# EAGLE board Day light emulate for birds (EAGLE 6.1)
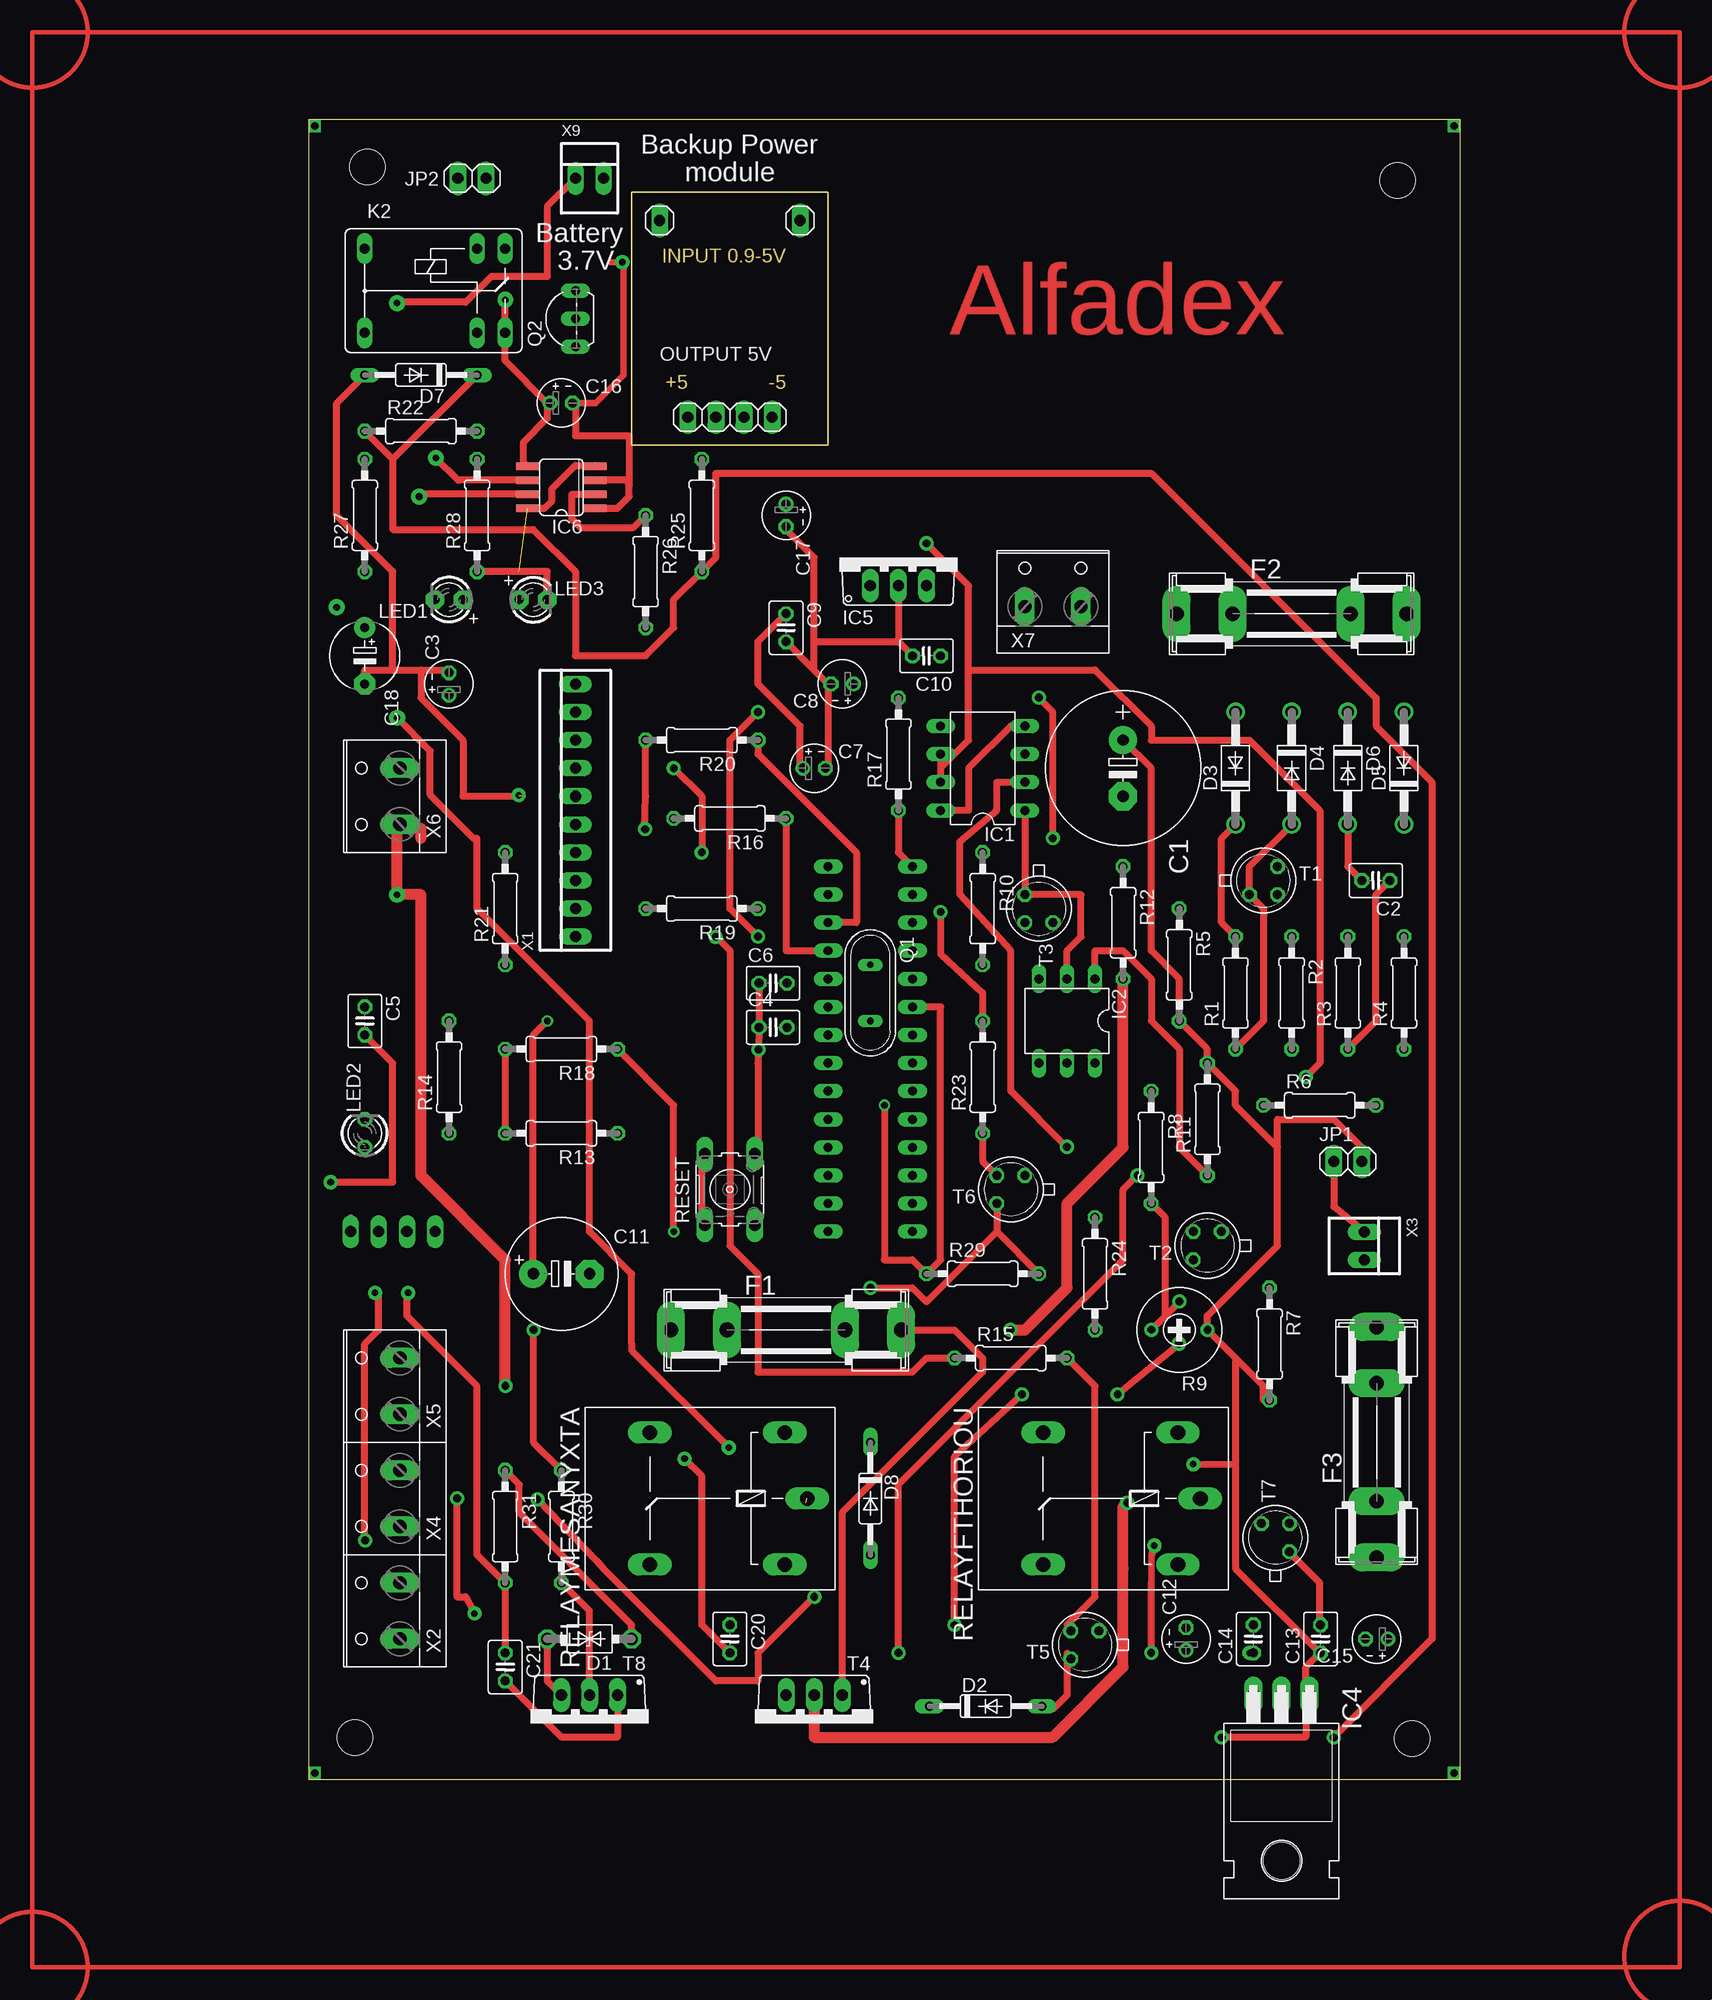
[diagram p0: board, top side]
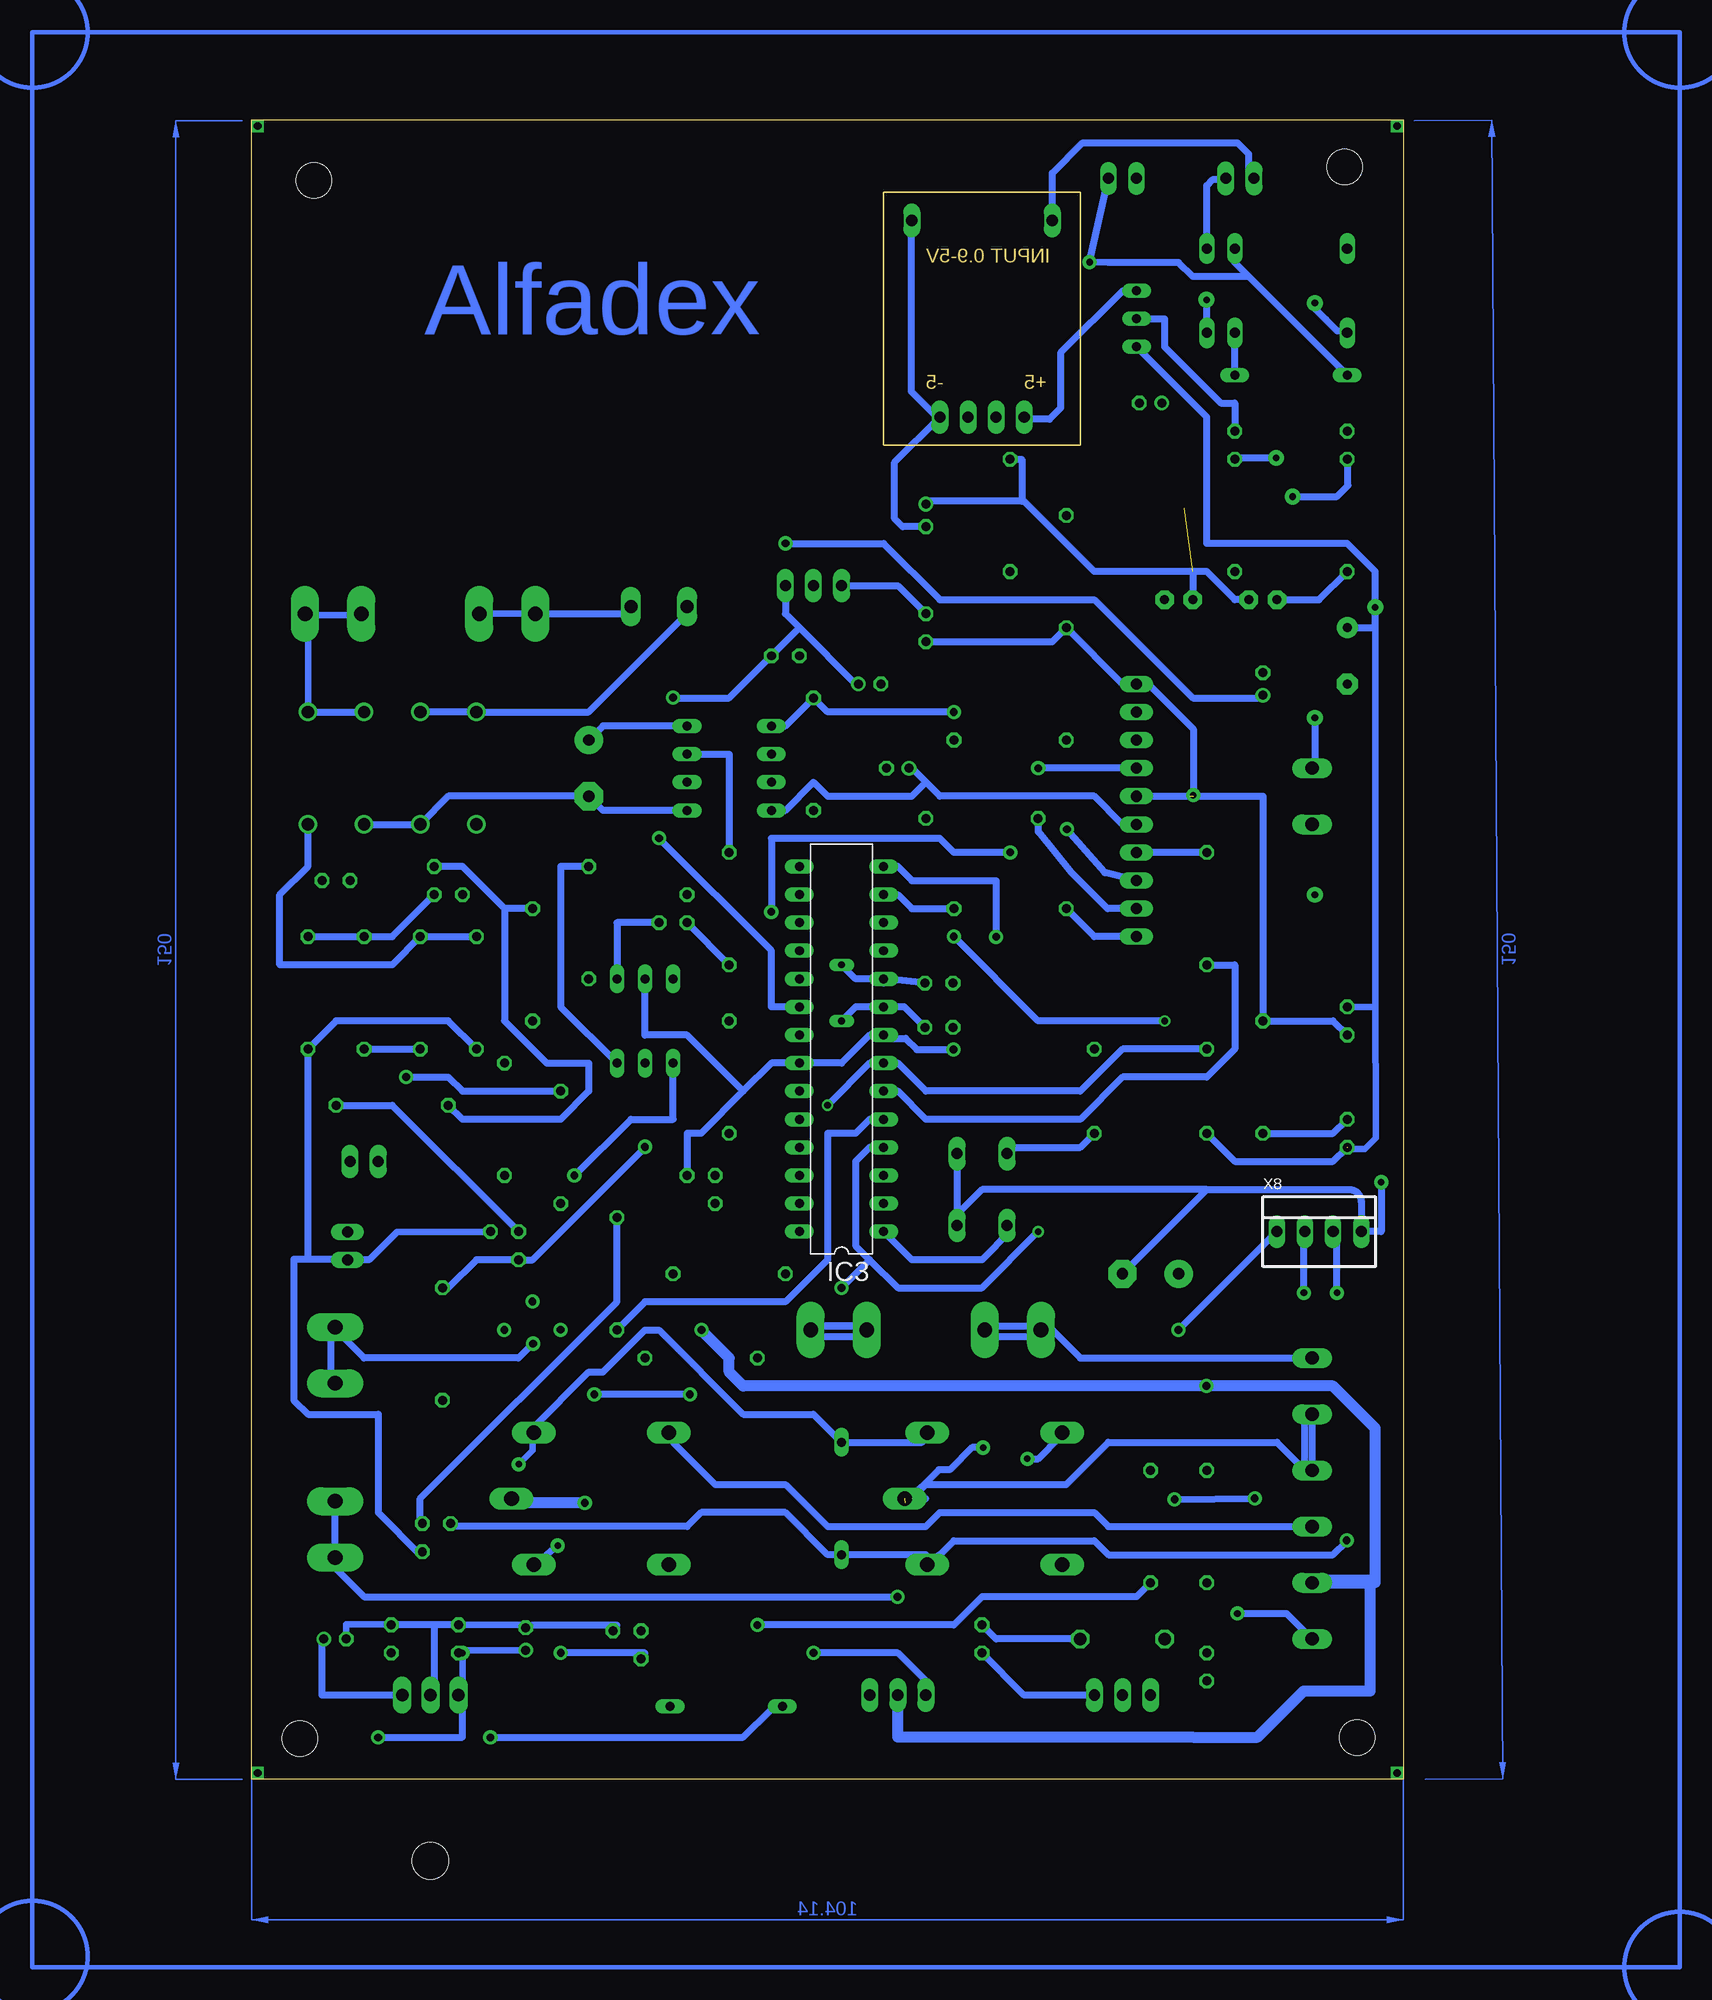
[diagram p1: board, bottom side, seen from below]

Size 104.16 x 150.08 mm. Coordinates in mm from the lower left corner, seen from the top.
Outline: 0,0 104.16,0 104.16,150.08 0,150.08 0,0
Copper layers (1*16): Top 0.035mm / dielectric 1.5mm / Bottom 0.035mm
Design rules: minimum track width 25mil, minimum drill 24mil, track to track 30mil, track to pad 30mil, pad to pad 15mil, via to via 8mil, smd to smd 8mil, copper to edge 40mil, drill to drill 8mil, minimum pad ring 10mil, minimum via ring 8mil, stop-mask expansion 4mil, vias tented up to drill 0mil, thermal gap 10mil
Net classes: 0 default: width 0.038 mm; 1 230v: width 1.016 mm
Holes 3.2 mm at 5.3,145.8 98.5,144.6 4.2,3.8 99.8,3.7

## Footprints (pad centres in the part's own frame; a part is rotated, then mirrored left to right if it is on the bottom)
E5-13 = drill 1.016 pad 2.54: + -2.54,0 | drill 1.016 pad 2.54 octagon: - 2.54,0
C025-030X050 = drill 0.813 octagon: 1 -1.27,0; 2 1.27,0
E2-4 = drill 0.813 pad 1.27: + -1.016,0 | drill 0.813 pad 1.27 octagon: - 1.016,0
E5-10,5 = drill 1.016 pad 2.54: + -2.54,0 | drill 1.016 pad 2.54 octagon: - 2.54,0
E5-6 = drill 0.813 pad 1.905: + -2.54,0 | drill 0.813 pad 1.905 octagon: - 2.54,0
GT32 = drill 1.118 octagon: 1 -3.81,0; 2 3.81,0
DO35-10 = drill 0.813 long: A 5.08,0; C -5.08,0
DO41-10 = drill 1.118: A 5.08,0; C -5.08,0
SHK20L = drill 1.321 pad 2.54 long: 1A -10.414,0; 1B -5.334,0; 2A 10.414,0; 2B 5.334,0
DIL-08 = drill 0.813 long: 1 -3.81,-3.81; 2 -1.27,-3.81; 3 1.27,-3.81; 4 3.81,-3.81; 5 3.81,3.81; 6 1.27,3.81; 7 -1.27,3.81; 8 -3.81,3.81
DIL06 = drill 0.813 long: 1 -2.54,-3.81; 2 0,-3.81; 3 2.54,-3.81; 4 2.54,3.81; 5 0,3.81; 6 -2.54,3.81
DIL28-3 = drill 0.813 long: 1 -16.51,-3.81; 2 -13.97,-3.81; 3 -11.43,-3.81; 4 -8.89,-3.81; 5 -6.35,-3.81; 6 -3.81,-3.81; 7 -1.27,-3.81; 8 1.27,-3.81; 9 3.81,-3.81; 10 6.35,-3.81; 11 8.89,-3.81; 12 11.43,-3.81; 13 13.97,-3.81; 14 16.51,-3.81; 15 16.51,3.81; 16 13.97,3.81; 17 11.43,3.81; 18 8.89,3.81; 19 6.35,3.81; 20 3.81,3.81; 21 1.27,3.81; 22 -1.27,3.81; 23 -3.81,3.81; 24 -6.35,3.81; 25 -8.89,3.81; 26 -11.43,3.81; 27 -13.97,3.81; 28 -16.51,3.81
TO220H = drill 1.118 long: 1 -2.54,-10.16; 2 0,-10.16; 3 2.54,-10.16 | hole 3.302: 0,4.826
TO220V = drill 1.016 long: 1 -2.54,-2.54; 2 0,-2.54; 3 2.54,-2.54
SO08 = smd 0.66 x 2.032: 1 -1.905,-3.073; 2 -0.635,-3.073; 3 0.635,-3.073; 4 1.905,-3.073; 5 1.905,3.073; 6 0.635,3.073; 7 -0.635,3.073; 8 -1.905,3.073
1X02 = drill 1.016 long: 1 -1.27,0; 2 1.27,0
FRS1B = drill 0.914 long: 1 0,3.81; 2 0,-3.81; O -2.54,-3.81; P 10.16,3.81; P@ 10.16,-3.81; S -2.54,3.81
LED3MM = drill 0.813 pad 1.676 octagon: A -1.27,0; K 1.27,0
LED3MM' = drill 0.813 octagon: A -1.27,0; K 1.27,0
QS = drill 0.61 long: 1 -2.54,0; 2 2.54,0
TO92-EBC = drill 0.813 long: B 0,-1.27; C -2.54,-1.27; E 2.54,-1.27
0207/10 = drill 0.813 octagon: 1 -5.08,0; 2 5.08,0
RTRIM3339P = drill 0.61: 1 -2.54,0; 2 0,-2.54; 3 2.54,0
G5LE = drill 1.321 long: 1 -7.493,-5.969; 2 -7.493,5.969; O 4.699,5.969; P -9.525,0; S 4.699,-5.969
B3F-10XX = drill 1.016 long: 1 -3.251,2.261; 2 3.251,2.261; 3 -3.251,-2.261; 4 3.251,-2.261
STEPUP_CONVERTER_600MA = drill 1.016 long: 3 -6.35,-8.89; 8 6.35,-8.89; 22 -3.81,8.89; 23 -1.27,8.89; 24 1.27,8.89; 25 3.81,8.89
TO18 = drill 0.813 octagon: 1 -1.27,-1.27; 2 1.27,-1.27; 3 1.27,1.27
TO220BV = drill 1.016 long: G 2.54,-2.54; T1 -2.54,-2.54; T2 0,-2.54
22-23-2101 = drill 1 long: 1 -11.43,0; 2 -8.89,0; 3 -6.35,0; 4 -3.81,0; 5 -1.27,0; 6 1.27,0; 7 3.81,0; 8 6.35,0; 9 8.89,0; 10 11.43,0
W237-132 = drill 1.194 long: 1 -2.54,-0.635; 2 2.54,-0.635
22-23-2021 = drill 1 long: 1 -1.27,0; 2 1.27,0
22-23-2041 = drill 1 long: 1 -3.81,0; 2 -1.27,0; 3 1.27,0; 4 3.81,0

## Placement (x,y rotation side)
C1  1000μ  [E5-13]  73.66,91.44 270 top
C2  100n  [C025-030X050]  96.52,81.28 180 top
C3  1μ  [E2-4]  12.7,99.06 90 top
C4  22p  [C025-030X050]  42,68 0 top
C5  100n  [C025-030X050]  5.08,68.58 270 top
C6  22p  [C025-030X050]  42,72 0 top
C7  47μ  [E2-4]  45.72,91.44 0 top
C8  47μ  [E2-4]  48.26,99.06 180 top
C9  100n  [C025-030X050]  43.18,104.14 270 top
C10  100n  [C025-030X050]  55.88,101.6 180 top
C11  220μ  [E5-10,5]  22.86,45.72 0 top
C12  1μ  [E2-4]  79.36,12.7 90 top
C13  100n  [C025-030X050]  91.52,12.7 90 top
C14  100n  [C025-030X050]  85.44,12.7 90 top
C15  1μ  [E2-4]  96.6,12.7 180 top
C16  10μ  [E2-4]  22.86,124.46 0 top
C17  10μ  [E2-4]  43.18,114.3 270 top
C18  3300μF 6.3v  [E5-6]  5.08,101.6 270 top
C20  47n  [C025-030X050]  38.1,12.7 270 top
C21  47n  [C025-030X050]  17.78,10.16 270 top
D1  DIAC  [GT32]  25.4,12.7 180 top
D2  1N4148  [DO35-10]  61.23,6.62 0 top
D3  1  [DO41-10]  83.82,91.44 90 top
D4  2  [DO41-10]  88.9,91.44 270 top
D5  3  [DO41-10]  99.06,91.44 90 top
D6  [DO41-10]  93.98,91.44 270 top
D7  1N4148  [DO35-10]  10.16,127 180 top
D8  1N4148  [DO35-10]  50.8,25.4 270 top
F1  6A  [SHK20L]  43.18,40.64 0 top
F2  1A  [SHK20L]  88.9,105.41 0 top
F3  6A  [SHK20L]  96.6,30.48 90 top
IC1  NE555  [DIL-08]  60.96,91.44 90 top
IC2  Moc3021  [DIL06]  68.58,68.58 180 top
IC3  ATMEGA168-PU  [DIL28-3]  50.8,66.04 90 bottom
IC4  7806T  [TO220H]  87.98,-2.54 180 top
IC5  7805  [TO220V]  53.34,110.49 0 top
IC6  TP4056  [SO08]  22.86,116.84 90 top
JP1  Ammeter jumper  [1X02]  93.98,55.88 0 top
JP2  Power Battery on  [1X02]  14.78,144.78 0 top
K2  FRS1B  [FRS1B]  15.24,134.62 180 top
LED1  RED  [LED3MM]  12.7,106.68 180 top
LED2  Arduino led  [LED3MM']  5.08,58.42 90 top
LED3  BLUE  [LED3MM]  20.32,106.68 0 top
Q1  16MHz  [QS]  50.8,71.12 270 top
Q2  BC558A  [TO92-EBC]  22.86,132.08 90 top
R1  10k  [0207/10]  83.82,71.12 90 top
R2  1k  [0207/10]  88.9,71.12 270 top
R3  4.7k  [0207/10]  93.98,71.12 90 top
R4  100k  [0207/10]  99.06,71.12 90 top
R5  10k  [0207/10]  78.74,73.66 270 top
R6  1k  [0207/10]  91.44,60.96 0 top
R7  4.7k  [0207/10]  86.9,39.37 270 top
R8  1k  [0207/10]  76.2,57.15 270 top
R9  20k  [RTRIM3339P]  78.74,40.64 180 top
R10  1.5k  [0207/10]  60.96,78.74 270 top
R11  1k  [0207/10]  81.28,59.69 90 top
R12  1k  [0207/10]  73.66,77.47 270 top
R13  10k  [0207/10]  22.86,58.42 180 top
R14  1k  [0207/10]  12.7,63.5 90 top
R15  22k  [0207/10]  63.5,38.1 0 top
R16  560  [0207/10]  38.1,86.9 180 top
R17  1k  [0207/10]  53.34,92.71 90 top
R18  10k  [0207/10]  22.86,66.04 180 top
R19  560  [0207/10]  35.56,78.74 180 top
R20  560  [0207/10]  35.56,93.98 180 top
R21  560  [0207/10]  17.78,78.74 90 top
R22  3.9k  [0207/10]  10.16,121.92 0 top
R23  1k  [0207/10]  60.96,63.5 90 top
R24  22k  [0207/10]  71.12,45.72 270 top
R25  0.5  [0207/10]  35.56,114.3 90 top
R26  1.5K  [0207/10]  30.48,109.22 270 top
R27  10K  [0207/10]  5.08,114.3 90 top
R28  10K  [0207/10]  15.24,114.3 90 top
R29  5.6k  [0207/10]  60.96,45.72 0 top
R30  3.3k  [0207/10]  22.86,22.86 270 top
R31  15k  [0207/10]  17.78,22.86 270 top
RELAYFTHORIOU  G5L  [G5LE]  71.12,25.4 180 top
RELAYMESANYXTA  G5L  [G5LE]  35.56,25.4 180 top
RESET  [B3F-10XX]  38.1,53.34 90 top
STEPUP1  steup converter 600mA  [STEPUP_CONVERTER_600MA]  38.1,132.08 180 top
T1  2N2222  [TO18]  86.36,81.28 0 top
T2  2N2222  [TO18]  81.28,48.26 180 top
T3  2n2222  [TO18]  66.04,78.74 270 top
T4  BT138-V  [TO220BV]  45.72,5.08 180 top
T5  2N2222  [TO18]  70.2,12.16 180 top
T6  2N2222  [TO18]  63.5,53.34 180 top
T7  2N2222  [TO18]  87.44,21.86 90 top
T8  BT138-V  [TO220BV]  25.4,5.08 180 top
X1  22-23-2101  [22-23-2101]  24.13,87.63 90 top
X2  night bulb  [W237-132]  7.62,15.24 90 top
X3  power 12V  [22-23-2021]  95.48,48.24 270 top
X4  fluerecent  [W237-132]  7.62,25.4 90 top
X5  Bulb  [W237-132]  7.62,35.56 90 top
X6  230AC  [W237-132]  7.62,88.9 90 top
X7  9Vac  [W237-132]  67.31,106.68 0 top
X8  22-23-2041  [22-23-2041]  7.62,49.53 0 bottom
X9  [22-23-2021]  25.4,144.78 0 top

## Library data of the parts
C1-C18 C20 C21 R1-R8 R10-R25 R27-R31 = rcl
D1-D8 = diode
F1-F3 = fuse
IC1 = st-microelectronics
IC2 = ic-package
IC3 = Arduino-AVR
IC4 IC5 = linear
IC6 LED1 LED3 = adafruit
JP1 JP2 = pinhead
K2 RELAYFTHORIOU RELAYMESANYXTA = relay
LED2 = led
Q1 = special
Q2 = transistor-pnp
R9 = resistor
R26 = rcl; CURRENT: When battery fully empty,entire 12v current is 800mA
RESET = switch-omron
STEPUP1 = Step up converter 600mA; STEPUP: step up converter 600mA
T1-T3 T5-T7 = transistor
T4 T8 = triac
X1 X3 X8 X9 = con-molex
X2 X4-X7 = con-wago-508; OC_FARNELL: unknown; OC_NEWARK: unknown

## Nets
1.16MA: Q2.B R22.2
230V: RELAYMESANYXTA.P X4.2 X5.1 X6.2
+5V: C5.1 C8.+ C10.1 C18.+ IC3.7 IC3.20 IC5.3 LED2.A Q2.C R13.2 R18.2 R29.1
+12V: C1.+ C7.+ C9.1 C13.1 C15.+ D2.C D8.C IC1.4 IC1.8 IC4.1 IC5.1 JP1.2 R5.2 R7.2 R9.1 R11.2 RELAYFTHORIOU.1 RELAYMESANYXTA.1 X1.5
GND: C1.- C2.2 C3.- C4.1 C5.2 C6.1 C7.- C8.- C9.2 C10.2 C11.- C12.- C13.2 C14.2 C15.- C16.- C17.- C18.- D4.A D6.A D7.A IC1.1 IC2.2 IC3.8 IC3.22 IC4.2 IC5.2 IC6.1 IC6.3 K2.2 R1.1 R4.1 R14.2 R26.2 RESET.3 RESET.4 STEPUP1.3 STEPUP1.22 T1.1 T2.1 T3.1 T5.1 T6.1 T7.1 X1.6 X1.10 X3.2 X8.4 X9.2
MORNING: R19.2 X1.1
N$1: IC3.11 R16.1
N$2: C2.1 R2.2 R3.1
N$3: R3.2 R4.2 T1.2
N$4: R5.1 R6.1 T1.3
N$5: R6.2 T2.2
N$6: IC1.2 R7.1 T2.3
N$7: R8.2 R9.2 R9.3
N$8: IC1.3 R10.1
N$9: C3.+ IC1.6 IC1.7 R8.1
N$10: R10.2 T3.2
N$11: IC2.1 R11.1 T3.3
N$12: IC2.6 R12.1
N$13: IC2.4 T4.G
N$14: F1.1A X5.2
N$15: JP2.1 STEPUP1.8
N$16 [230v]: R12.2 RELAYFTHORIOU.P T4.T2 X2.2 X6.1
N$17: F2.1A X7.2
N$18: IC3.1 R13.1 RESET.1 RESET.2
N$19: LED2.K R14.1
N$20: D1.2 T8.G
N$21: C6.2 IC3.10 Q1.1
N$22: C4.2 IC3.9 Q1.2
N$23: IC3.14 R15.1
N$24: R15.2 T5.2
N$25: D2.A RELAYFTHORIOU.2 T5.3
N$26: IC3.13 R19.1
N$27: C11.+ IC1.5 R17.2
N$28: R16.2 X1.2
N$29: IC3.15 R17.1
N$30: IC3.6 R21.1
N$31: R21.2 X1.4
N$32: RELAYFTHORIOU.S X4.1
N$33: IC3.12 R20.1
N$34: D3.A D4.C X7.1
N$35: D5.A D6.C F2.2A
N$36: D3.C D5.C R1.2 R2.1
N$37: R20.2 X1.3
N$38: K2.P X9.1
N$39: JP2.2 K2.O
N$40: C12.+ C14.1 D7.C IC4.3 K2.1 R22.1 R25.1
N$41: IC3.5 R24.2
N$42: R24.1 T7.2
N$43: D8.A RELAYMESANYXTA.2 T7.3 X8.3
N$44: C20.2 C21.2 RELAYMESANYXTA.S T8.T1
N$45: Q2.E STEPUP1.25
N$46: C17.+ IC6.4 IC6.8 LED1.A LED3.A R25.2
N$47: IC6.7 R27.2
N$48: IC6.6 R28.2
N$49: C16.+ IC6.5 K2.S
N$50: LED1.K R27.1
N$51: IC6.2 R26.1
N$52: LED3.K R28.1
N$53: JP1.1 X3.1
N$54: R23.2 X1.7
N$55: R23.1 T6.2
N$56: IC3.4 R18.1 R29.2 T6.3
N$57: C20.1 D1.1 R31.1
N$58: C21.1 R31.2 X8.2
N$59: R30.1 X8.1
N$60: F3.1A X2.1
N$61: F3.2A R30.2 T8.T2
N$62: F1.2A T4.T1

## Tracks (layer width: path | path; a pad name or v marks a point on that pad's centre or on a via)
1.16MA
  Bottom 0.635: R22.2 15.24,124.46 16.51,124.46 21.59,129.54 21.59,132.08 Q2.B
230V  (via drill 0.6 pad 1.27, 0.6 pad 1.42)  (2 unrouted)
  Top 0.635: 8.89,27.94 X4.2 | 44.45,25.4 RELAYMESANYXTA.P | v38,30 29.21,38.79 29.21,39.37 29.21,45.72 25.4,49.53 25.4,68.58 15.24,78.74 15.24,85.09 14.91,85.09 11,89 11,93 v8,96
  Bottom 0.635: 8.89,27.94 11.43,30.48 26.67,30.48 30.48,26.67 43.18,26.67 44.45,25.4 43.18,25.4 | 8.89,27.94 X4.2 | v38,30 39,30 41,28 42,28 45,25 | 8,28 8.26,28.25 X5.1 8.89,32.38 8.89,27.94 | v8,96 8,92 8.5,91.5 | 8.5,91.5 9,91 | X6.2 8.44,91.44 8.5,91.5
+5V  (via drill 0.6 pad 1.42, 0.61)  (1 unrouted)
  Top 0.635: IC3.20 57.15,69.85 57.15,46.99 R29.1 54.61,46.99 52.07,46.99 v52.07,60.96 | v66.04,97.79 67.31,96.52 v67.31,85.09 | R18.2 R13.2
  Bottom 0.61: v2.54,106 2.51,69.8 | 2.51,69.8 2.5,59.7 2.5,58 3.5,57 4.9,57 5.1,57.2 | C5.1 2.56,69.85 2.51,69.8
  Bottom 0.635: 54.61,104.14 55.88,105.41 IC5.3 | 54.61,104.14 49.53,99.06 C8.+ | 54.61,104.14 C10.1 60.96,97.79 v66.04,97.79 | v67.31,85.09 57.15,74.93 57.15,69.85 IC3.20 | Q2.C 17.78,123.19 17.78,111.76 5.08,111.76 2.54,109.22 v2.54,106 2.54,104.14 C18.+ | LED2.A 6.35,55.88 15.24,55.88 R13.2 | R18.2 25.4,66.04 29.21,62.23 43.18,62.23 45.72,64.77 IC3.7 48.26,64.77 v52.07,60.96
+12V  (via drill 0.6 pad 1.27, 0.61)
  Top 0.61: v80,28.5 83.5,28.5 83.82,28.5
  Top 0.635: C9.1 40.64,102.87 40.64,99.06 44.45,95.25 44.45,91.44 C7.+ | v82.55,3.81 90.17,3.81 90.17,7.62 | 90.17,7.62 IC4.1 90.17,7.62 | 91.44,11.43 90.17,10.16 90.17,7.62 | 91.44,11.43 C13.1 91.44,11.43 | IC1.8 59.69,87.63 59.69,91.44 63.5,95.25 IC1.4 | 83.82,38.1 86.36,35.56 86.36,34.29 R7.2 | 83.82,38.1 R9.1 81.28,41.91 87.63,48.26 87.63,57.15 | JP1.2 95.25,57.15 92.71,59.69 87.63,59.69 87.63,57.15 | 83.82,38.1 83.82,36.83 83.82,28.5 83.82,19.05 91.44,11.43 | 78.74,31.75 RELAYFTHORIOU.1 | 87.63,57.15 83.82,60.96 83.82,62.23 R11.2 81.28,66.04 R5.2 78.74,72.39 76.2,74.93 76.2,91.44 C1.+
  Bottom 0.61: 78.74,31.75 78.74,29.76 v80,28.5
  Bottom 0.635: C9.1 45.72,107.95 IC5.1 | 43.18,90.17 41.91,88.9 27.94,88.9 25.4,86.36 X1.5 | 43.18,90.17 44.45,91.44 C7.+ | v82.55,3.81 59.69,3.81 57.15,6.35 D2.C | IC4.1 97.79,7.62 97.79,12.7 C15.+ | IC4.1 90.17,7.62 IC4.1 | C1.+ 72.39,95.25 IC1.4 | RELAYFTHORIOU.1 78.74,31.75 73.66,36.83 72.39,36.83 68.58,40.64 67.31,40.64 59.69,33.02 53.34,33.02 D8.C 43.52,30.48 43,31 43.05,31.05 RELAYMESANYXTA.1 | 43.18,90.17 44.45,88.9 52.07,88.9 53.34,90.17 55.88,87.63 IC1.8
GND  (via drill 0.6 pad 1.27)  (1 unrouted)
  Top 0.61: 24.13,124.46 25.96,124.46 28.5,127 28.5,137.1 27.3,137.2 28.47,137.1 v28.37,137.2
  Top 0.635: 53.34,102.87 C10.2 | IC5.2 53.34,102.87 | 46.99,99.06 46.99,91.44 C7.- | 46.99,99.06 45.72,100.33 | 45.72,100.33 C9.2 | 46.99,99.06 C8.- | 45.72,100.33 45.72,102.87 | 45.72,102.87 45.72,110.49 43.18,113.03 C17.- | 45.72,102.87 53.34,102.87 | C16.- 24.13,124.46 24.13,121.5 29,121.5 29,117 | 7.62,100.33 5.08,100.33 C18.- | 7.62,100.33 10.16,100.33 | 10.16,100.33 12.7,100.33 C3.- | 19.32,88.9 13.97,88.9 13.97,93.98 10.16,97.79 10.16,100.33 | D7.A 2.54,124.46 2.54,114.3 7.62,109.22 7.62,100.33 | T7.1 88.9,20.32 91.44,17.78 91.44,13.97 C13.2 | C2.2 93.98,82.55 D6.A | R1.1 86.36,68.58 86.36,78.74 T1.1 85.09,82.55 D4.A | IC1.1 T3.1 69.85,80.01 69.85,76.2 68.58,74.93 IC2.2 | C6.1 C4.1 v40.67,66.01 40.64,64.77 40.64,57.15 RESET.4 | C5.2 7.62,64.77 7.62,54 v2,54 | X8.4 3.81,50.8 | X1.6 arc60 v24,89 | IC6.1 27.93,114.94 29,116 29,117 | 29,117 28.9,117.5 26.51,117.5 IC6.3
  Bottom 0.61: v95.52,47.03 95.52,47.01 X3.2 95.5,47 95.47,47.03 v95.29,47.03 | C14.2 79.61,13.97 C12.- | C15.- 95.58,14 91.4,14 91.4,13.97 C13.2
  Bottom 0.635: C9.2 31.75,102.87 R26.2 25.4,99.06 X1.10 23.06,99.06 19,95 19,88.9 | 13.97,135.89 15.24,137.16 K2.2 | 13.97,135.89 D7.A | C5.2 6.35,68.58 R14.2 12.7,88.9 19,88.9 | X1.6 24,88.9 | X9.2 v28.37,137.2 26.67,137.16 20.32,137.16 19.05,135.89 13.97,135.89 | 17.78,53.34 4.9,53.34 arc90 3.81,52.25 X8.4 2,49.53 v2,54 | C11.- 17.78,53.34 | 17.78,53.34 38.1,53.34 40.64,50.8 RESET.3 RESET.4 40.36,57 40,57 | T5.1 71.12,13.97 78.74,13.97 C12.- | 87.63,13.97 87.63,7.62 IC4.2 | 87.63,13.97 C14.2 85.09,13.97 | 87.63,13.97 C13.2 | T2.1 91,49.5 93.47,47.03 v95.29,47.03 v95.52,47.03 99.06,47.03 | 99.06,47.03 R4.1 96.52,68.58 86.36,68.58 R1.1 | D6.A D4.A 86.36,88.9 C1.- 72.39,87.63 IC1.1 | T6.1 64.77,58.42 63.5,58.42 59.69,62.23 | 59.69,62.23 57.15,64.77 IC3.22 50.8,64.77 48.26,67.31 IC3.8 46.68,67 45,67 44,66 43.99,66.01 v40.67,66.01 | IC2.2 68.58,67.31 64.77,67.31 59.69,62.23 | 99.06,47.03 100.33,47.03 100.33,34.29 99.06,33.02 92.71,33.02 92.71,24.13 88.9,20.32 T7.1 | v24,89 24,88.9 | 24,88.9 19,88.9 | C17.- 45.28,113.28 46,114 46,119.1 STEPUP1.22 42.19,123.19 44.5,125.5 44.5,141 44.47,140.97 STEPUP1.3
MORNING
  Bottom 0.635: R19.2 27.94,76.2 X1.1
N$1
  Top 0.635: IC3.11 43.18,74.93 43.18,83.82 R16.1
N$2
  Top 0.635: C2.1 96.52,80.01 96.52,68.58 R3.1
  Bottom 0.635: R3.1 R2.2
N$3
  Bottom 0.635: R4.2 R3.2 91.44,76.2 T1.2
N$4
  Bottom 0.635: R6.1 85.09,59.69 76.2,59.69 73.66,62.23 73.66,64.77 77.47,64.77 81.28,68.58 81.28,78.74 | R5.1 81.28,78.74 | T1.3 85.09,82.55 81.28,78.74
N$5
  Bottom 0.635: T2.2 91.44,60.96 R6.2
N$6  (via drill 0.61)
  Top 0.635: IC1.2 62.23,90.17 62.23,87.63 58.92,84.82 58.92,80.01 63.5,74.93 63.5,62.23 v68.58,57.15
  Bottom 0.635: R7.1 86.36,44.45 83.82,46.99 T2.3 78.74,46.99 v68.58,57.15
N$7
  Top 0.635: R9.2 77.47,41.91 | 77.47,41.91 R9.3 | R8.2 77.47,50.8 77.47,41.91
N$8
  Bottom 0.635: R10.1 60.96,92.71 IC1.3
N$9  (via drill 0.61)
  Top 0.635: IC1.6 57.15,91.44 | 57.15,91.44 IC1.7 | v90.17,63.5 91.44,64.77 91.44,87.63 85.09,93.98 76.2,93.98 76.2,95.25 71.12,100.33 59.69,100.33 | 59.69,100.33 59.69,93.98 57.15,91.44 | v55.88,111.76 59.69,107.95 59.69,100.33
  Bottom 0.635: R8.1 85.09,62.23 86.36,63.5 v90.17,63.5 | v55.88,111.76 46.99,111.76 41.91,106.68 27.94,106.68 19.05,97.79 12.7,97.79 C3.+
N$10
  Bottom 0.635: T3.2 R10.2
N$11
  Top 0.635: R11.1 78.74,57.15 78.74,66.04 76.2,68.58 76.2,72.39 73.66,74.93 71.12,74.93 IC2.1
  Bottom 0.635: IC2.1 71.12,77.47 T3.3
N$12
  Bottom 0.635: IC2.6 76.2,69.85 76.2,82.55 R12.1
N$13  (via drill 0.61, 0.7 pad 1.27)
  Top 0.635: v74.93,54.61 73.66,53.34 73.66,46.99 53.34,26.67 v53.34,11.45 v53.34,11.43
  Bottom 0.635: IC2.4 66.04,59.69 69.85,59.69 v74.93,54.61 | v53.34,11.43 45.72,11.43 43.18,8.89 T4.G
N$14
  Bottom 0.635: X5.2 8.89,38.1 29.21,38.1 31.75,40.64 F1.1A
N$15
  Bottom 0.635: STEPUP1.8 31.75,145.25 29,148 18,148 15,148 14,147 14,145.27 JP2.1
N$16  (via drill 0.6 pad 1.27, 0.6 pad 1.42, 0.61)
  Top 1.016: R12.2 73.66,57.15 68.58,52.07 68.58,44.45 64.77,40.64 v63.5,40.64 | v17.78,35.56 17.78,46.99 10.16,54.61 10.16,80 v8,80 8,86 | T4.T2 45.72,3.81 67.31,3.81 73.66,10.16 73.66,19.05 73.66,24.66 v74,25 | 10.16,86 10.16,85.09 10.16,86 | 10.16,86 9,86 | 9,86 8,86 | 10.16,86 9,86 | 8.89,86.36 8.89,86 8,86 | 8,86 8,86.36 X6.1 8.26,86 8,86 | 9,86 8,86
  Bottom 1.016: v63.5,40.64 60.96,38.1 60.96,36.83 59.69,35.56 v17.78,35.56 6.35,35.56 2.54,31.75 2.54,17.78 7.62,17.78 X2.2 | T4.T2 45.72,3.81 19.05,3.81 13.19,3.81 9,8 3,8 3,18 8.04,18 X2.2 | 8.89,17.78 X2.2 | v74,25 80.25,25 RELAYFTHORIOU.P 80.64,25.36 81,25 80.6,25.4 80.01,25.4
N$17
  Bottom 0.635: F2.1A 70.48,105.41 X7.2
N$18
  Top 0.635: RESET.2 35.56,55.88 35.56,50.8 RESET.1
  Bottom 0.635: R13.1 29.21,57.15 35.56,57.15 RESET.2 | IC3.1 44.45,46.99 38.1,46.99 35.56,49.53 RESET.1
N$19
  Bottom 0.635: LED2.K 6.35,58.42 R14.1
N$20
  Top 0.635: T8.G 21.59,8.89 D1.2
N$21
  Bottom 0.635: Q1.1 49.53,72.39 IC3.10 46.99,72.01 arc90 47,72 arc90 46.61,72.39 C6.2
N$22
  Bottom 0.635: Q1.2 49.53,69.85 IC3.9 45.12,69.85 C4.2
N$23  (via drill 0.61)
  Top 0.635: R15.1 55.88,38.1 54.61,36.83 40.64,36.83 40.64,45.72 38.1,48.26 38.1,74.93 v36.83,76.2
  Bottom 0.635: v36.83,76.2 36.83,81.28 44.45,81.28 45.72,82.55 IC3.14
N$24
  Top 0.635: R15.2 71.12,35.56 71.12,16.51 68.58,13.97 T5.2
N$25  (via drill 0.6 pad 1.27, 0.61, 0.7 pad 1.27)
  Top 0.61: 76.2,17.78 76.2,20.2 v76.47,21.14
  Top 0.635: D2.A 67.31,6.35 68.58,7.62 68.58,11.43 T5.3 | v76.2,11.43 v76.2,11.45 76.2,17.78
  Bottom 0.61: v76.47,21.14 79,19 78,19 78.18,19 RELAYFTHORIOU.2
  Bottom 0.635: v76.2,11.43 68.58,11.43 T5.3
N$26
  Bottom 0.635: R19.1 44.45,78.74 45.72,80.01 IC3.13
N$27  (via drill 0.61)
  Top 0.635: v40.64,96.52 38.1,93.98 38.1,78.74 v40.64,76.2 | v21.59,68.58 20.32,67.31 C11.+
  Bottom 0.635: IC1.5 55.88,95.25 R17.2 52.07,96.52 v40.64,96.52 | v40.64,76.2 33.02,68.58 v21.59,68.58
N$28
  Bottom 0.635: X1.2 26.74,78.74 30,82 33,85.7 33,86.7 R16.2
N$29
  Top 0.635: IC3.15 53.34,83.82 R17.1
N$30
  Bottom 0.635: IC3.6 45.72,62.23 43.18,59.69 29.21,59.69 25.4,63.5 17.78,63.5 15.24,66.04 15.24,73.66 R21.1
N$31
  Bottom 0.635: R21.2 23.82,83.82 24,84 24,83.95 X1.4
N$32
  Bottom 0.635: X4.1 8.89,22.86 26.67,22.86 27.94,24.13 41.91,24.13 43.18,22.86 52.07,22.86 55.88,26.67 62.23,26.67 66.04,30.48 RELAYFTHORIOU.S
N$33
  Top 0.635: IC3.12 49.53,77.47 49.53,83.82 40.64,92.71 R20.1
N$34
  Bottom 0.635: X7.1 64.77,105.41 73.66,96.52 D3.A 89,96.5 D4.C
N$35
  Bottom 0.61: D5.A 99.06,105.16 F2.2A
  Bottom 0.635: D5.A D6.C
N$36
  Top 0.635: D3.C 82.55,85.09 82.55,77.47 R1.2
  Bottom 0.635: R1.2 R2.1 91.44,73.66 101.6,73.66 101.6,80.01 99.06,82.55 D5.C
N$37  (via drill 0.61, 0.7 pad 1.27)
  Top 0.635: R20.2 v30.48,93.97 30.48,88.9 v30.4,85.9
  Bottom 0.635: v30.4,85.9 27,82 X1.3
N$38  (via drill 0.6 pad 1.42)
  Top 0.635: X9.1 21.59,142.24 21.59,135.89 16.51,135.89 14.2,133.58 8,133.58 v8,133.5
  Bottom 0.635: v8,133.5 8,133 7,132 6,131 5,131 5.08,130.92 K2.P
N$39
  Bottom 0.635: K2.O 17.78,144.12 17.2,144.7 16.1,144.7 16,144.8 16.03,144.8 JP2.2
N$40  (via drill 0.6 pad 1.27, 0.61)
  Top 0.635: v85.09,11.43 C14.1 | 85.09,7.62 IC4.3 | 7.62,119.38 7.62,113.03 20.32,113.03 24.13,109.22 24.13,101.6 30.48,101.6 33.02,104.14 33.02,106.68 R25.1 36.83,110.49 36.83,118.11 76.2,118.11 96.52,97.79 96.52,95.25 101.6,90.17 101.6,12.7 v92.71,3.81 | R22.1 7.62,119.38 | 7.62,119.38 D7.C
  Bottom 0.61: C12.+ 85.19,11.68 C14.1 | v85.09,11.43 85.09,7.97 IC4.3
  Bottom 0.635: v92.71,3.81 85.09,3.81 85.09,7.62 IC4.3 | D7.C 15.24,130.74 15.5,131 15.31,130.81 K2.1
N$41
  Bottom 0.635: R24.2 68.58,43.18 55.88,43.18 52.07,46.99 52.07,58.42 49.53,58.42 48.26,59.69 IC3.5
N$42
  Bottom 0.635: R24.1 71.12,43.18 88.9,25.4 88.9,22.86 T7.2
N$43  (via drill 0.6 pad 1.27, 0.61)
  Top 0.635: v5.08,21.59 5.08,39.37 6.35,40.64 6.35,44 v6,44
  Bottom 0.635: T7.3 86.36,22.86 64.77,22.86 63.5,24.13 55.88,24.13 52.07,20.32 D8.A 43.18,20.32 RELAYMESANYXTA.2 41.91,20.32 40.64,21.59 27.94,21.59 26.67,20.32 6.35,20.32 v5.08,21.59 | v6,44 6,49.53 X8.3
N$44  (via drill 0.6 pad 1.27)
  Top 0.635: C21.2 22.86,3.81 27.94,3.81 T8.T1 | C20.2 35.56,13.97 35.56,26.67 35.56,27.44 v34,29
  Bottom 0.635: C20.2 34.29,7.62 T8.T1 | v34,29 33,29 31,31 30.86,31.14 RELAYMESANYXTA.S
N$45
  Bottom 0.635: Q2.E 25.38,134.62 31,129 31,124 32,123 34.1,123 STEPUP1.25
N$46  (1 unrouted)
  Top 0.635: IC6.8 21.34,114.94 22,115.6 22,116.7 22.5,117.2 24.1,118.8 25.88,118.8 IC6.4
  Bottom 0.635: 34.5,115.57 34.29,115.57 27.94,109.22 19.05,109.22 | 34.5,115.57 43.18,115.57 C17.+ | 19.05,109.22 17.78,109.22 15.24,106.68 LED1.A | 19.05,109.22 LED3.A | R25.2 34.5,119.38 34.5,115.57
N$47  (via drill 0.6 pad 1.42)
  Top 0.635: IC6.7 10.21,116.2 v10,116
  Bottom 0.635: v10,116 6,116 5,117 5,119.3 R27.2
N$48  (via drill 0.6 pad 1.42)
  Top 0.635: IC6.6 13.53,117.47 v11.5,119.5
  Bottom 0.635: v11.5,119.5 15.12,119.5 R28.2
N$49  (via drill 0.6 pad 1.42)
  Top 0.635: 21.59,124.46 17.78,128.27 17.78,133.78 v17.8,133.8 | 21.59,124.46 C16.+ | 21.59,124.46 21.59,123.09 19.4,120.9 19.4,119.13 IC6.5
  Bottom 0.635: v17.8,133.8 17.8,130.8 K2.S
N$50
  Bottom 0.635: R27.1 7.62,106.68 LED1.K
N$51
  Top 0.635: IC6.2 23.8,116.2 23.8,114 24.6,113.2 29.38,113.2 R26.1
N$52
  Top 0.635: R28.1 21.59,109.22 LED3.K
N$53  (via drill 0.6 pad 1.27)
  Top 0.635: v95.52,49.49 92.71,51.8 JP1.1
  Bottom 0.61: v95.52,49.49 95.5,49.49 X3.1
N$54  (via drill 0.61, 0.7 pad 1.27)
  Top 0.635: R23.2 60.96,71.12 57.15,74.63 v57.15,78.44 | v35.56,83.82 35.56,88.9 v33.02,91.44
  Bottom 0.635: v57.15,78.44 57.15,85.09 41.91,85.09 40.64,83.82 v35.56,83.82 | X1.7 v33.02,91.44
N$55
  Top 0.635: T6.2 60.96,55.88 R23.1
N$56  (via drill 0.61)
  Top 0.635: 62.23,49.53 R29.2 | T6.3 62.23,49.53 | R18.1 33.02,60.96 v33.02,49.53 | 62.23,49.53 55.88,43.18 54.61,44.45 v50.8,44.45
  Bottom 0.635: v33.02,49.53 38.1,44.45 45.72,44.45 48.26,46.99 | 48.26,46.99 49.53,48.26 49.53,55.88 48.26,57.15 IC3.4 | 48.26,46.99 v50.8,44.45
N$57
  Top 0.635: R31.1 19.05,26.67 19.05,24.13 29.21,13.97 D1.1
  Bottom 0.635: C20.1 36.83,12.7 D1.1
N$58  (via drill 0.6 pad 1.27)
  Top 0.635: C21.1 R31.2 15.24,20.32 15.24,35.56 8.89,41.91 8.89,44 v9,44
  Bottom 0.635: v9,44 9,49 8.89,49 X8.2
N$59  (via drill 0.61)
  Top 0.635: R30.1 20.32,30.48 v20.32,40.64
  Bottom 0.635: X8.1 v20.32,40.64
N$60  (via drill 0.6 pad 1.27, 0.61, 0.7 pad 1.27)
  Top 0.635: v13.4,25.4 13.4,16.51 14.19,16.51 v15,15 | v20.69,25.3 26.07,19.72 26.67,19.05 36.83,8.89 40.64,8.89 40.64,11.43 v45.72,16.51
  Bottom 0.635: v20.69,25.3 v13.4,25.4 | v45.72,16.51 v45.74,16.51 93.98,16.51 96.52,19.05 F3.1A 96.6,24.6 97,25 | v15,15 10.55,15 X2.1
N$61  (via drill 0.61)
  Top 0.635: R30.2 25.4,15.24 T8.T2 | v73.16,34.79 v78.74,39.37 | v64.5,34.79 58.42,29.21 v58.42,13.97
  Bottom 0.635: v78.74,39.37 80.01,38.1 93.98,38.1 96.52,40.64 F3.2A | v64.5,34.79 v73.16,34.79 | v58.42,13.97 40.64,13.97 38.1,16.51 24.13,16.51 R30.2
N$62
  Top 0.635: T4.T1 48.26,24.13 60.96,36.83 60.96,38.1 58.42,40.64 54.61,40.64 F1.2A
N$63
  Bottom 0.635: 97,41 97,36
N$64
  Bottom 0.635: 49,41 49,40 54,40 54,41 | 54,41 49,41 | 49,41 54,41
N$65
  Bottom 0.635: 38,41 33,41 33,40 38,40 38,41
N$66  (via drill 0.6 pad 1.27)
  other vias: 19,89
N$67
  Bottom 0.61: 94.4,105.3 99.4,105.3 99.4,105.4
N$68
  Bottom 0.61: 78.5,105.4 83.7,105.4
N$69  (via drill 0.7 pad 1.27)
  other vias: 40.65,96.51
N$70  (via drill 0.7 pad 1.27)
  other vias: 30.42,85.92
N$71  (via drill 0.7 pad 1.27)
  other vias: 55.88,111.77
N$72  (via drill 0.7 pad 1.27)
  other vias: 20.34,40.64
N$73  (via drill 0.7 pad 1.27)
  other vias: 17.8,35.57
N$74  (via drill 0.7 pad 1.27)
  other vias: 20.69,25.32
N$75  (via drill 0.7 pad 1.27)
  other vias: 13.44,25.41
N$76  (via drill 0.7 pad 1.27)
  other vias: 5.12,21.61
N$77  (via drill 0.7 pad 1.27)
  other vias: 50.81,44.44
N$78  (via drill 0.7 pad 1.27)
  other vias: 40.68,66.01
N$79  (via drill 0.7 pad 1.27)
  other vias: 36.82,76.19
N$80  (via drill 0.7 pad 1.27)
  other vias: 40.65,76.22
N$81  (via drill 0.7 pad 1.27)
  other vias: 35.55,83.83
N$82  (via drill 0.7 pad 1.27)
  other vias: 57.16,78.45
N$83  (via drill 0.7 pad 1.27)
  other vias: 58.42,13.96
N$84  (via drill 0.7 pad 1.27)
  other vias: 74.03,25.01
N$85  (via drill 0.7 pad 1.27)
  other vias: 64.52,34.81
N$86  (via drill 0.7 pad 1.27)
  other vias: 73.16,34.81
N$87  (via drill 0.7 pad 1.27)
  other vias: 63.47,40.64
N$88  (via drill 0.7 pad 1.27)
  other vias: 76.21,40.66
N$89  (via drill 0.7 pad 1.27)
  other vias: 78.76,43.21
N$90  (via drill 0.7 pad 1.27)
  other vias: 78.7,39.4
N$91  (via drill 0.7 pad 1.27)
  other vias: 81.3,40.64
N$92  (via drill 0.7 pad 1.27)
  other vias: 68.59,57.21
N$93  (via drill 0.7 pad 1.27)
  other vias: 74.97,54.61
N$94  (via drill 0.7 pad 1.27)
  other vias: 67.3,85.11
N$95  (via drill 0.7 pad 1.27)
  other vias: 66.04,97.82
N$96  (via drill 0.7 pad 1.27)
  other vias: 90.18,63.52
N$97  (via drill 0.7 pad 1.27)
  other vias: 92.72,3.79
N$98  (via drill 0.7 pad 1.27)
  other vias: 82.56,3.79
N$99  (via drill 0.7 pad 0.25)
  other vias: 0.56,149.52
N$100  (via drill 0.7 pad 0.25)
  other vias: 103.6,149.52
N$101  (via drill 0.7 pad 0.25)
  other vias: 103.6,0.56
N$102  (via drill 0.7 pad 0.25)
  other vias: 0.56,0.56
N$103  (via drill 0.7 pad 0.25)
  other vias: 4.2,3.8
N$104  (via drill 0.7 pad 0.25)
  other vias: 99.8,3.7
N$105  (via drill 0.7 pad 0.25)
  other vias: 98.5,144.6
N$106  (via drill 0.7 pad 0.25)
  other vias: 5.3,145.8
N$107
  Top 0.406: -25,-17 -24,-17 | -24,-17 124,-17 124,158 -25,158 -25,-17 | -25,-17 -24,-17
N$108
  Bottom 0.406: -25,158 124,158 124,-17 -25,-17 -25,158
(copper drawn outside any net)
  shapes: Bottom area x3, Bottom circle x4, Top circle x4

## Text on the board
Top: Alfadex
Bottom: Alfadex
tPlace: Battery | 3.7V
tNames: Backup Power | module